# EAGLE board BSB-Board (EAGLE 7.1.0)
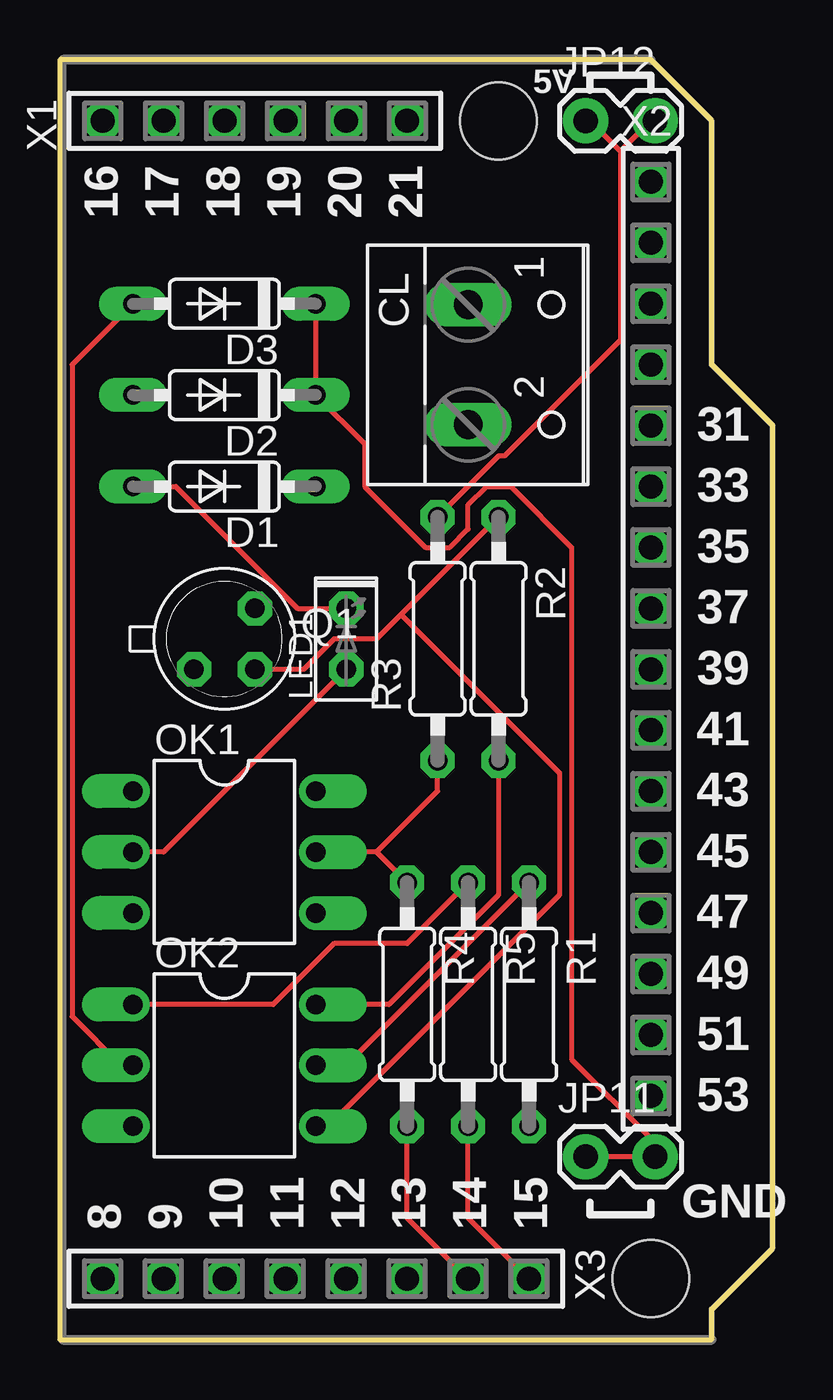
[diagram p0: board, top side]
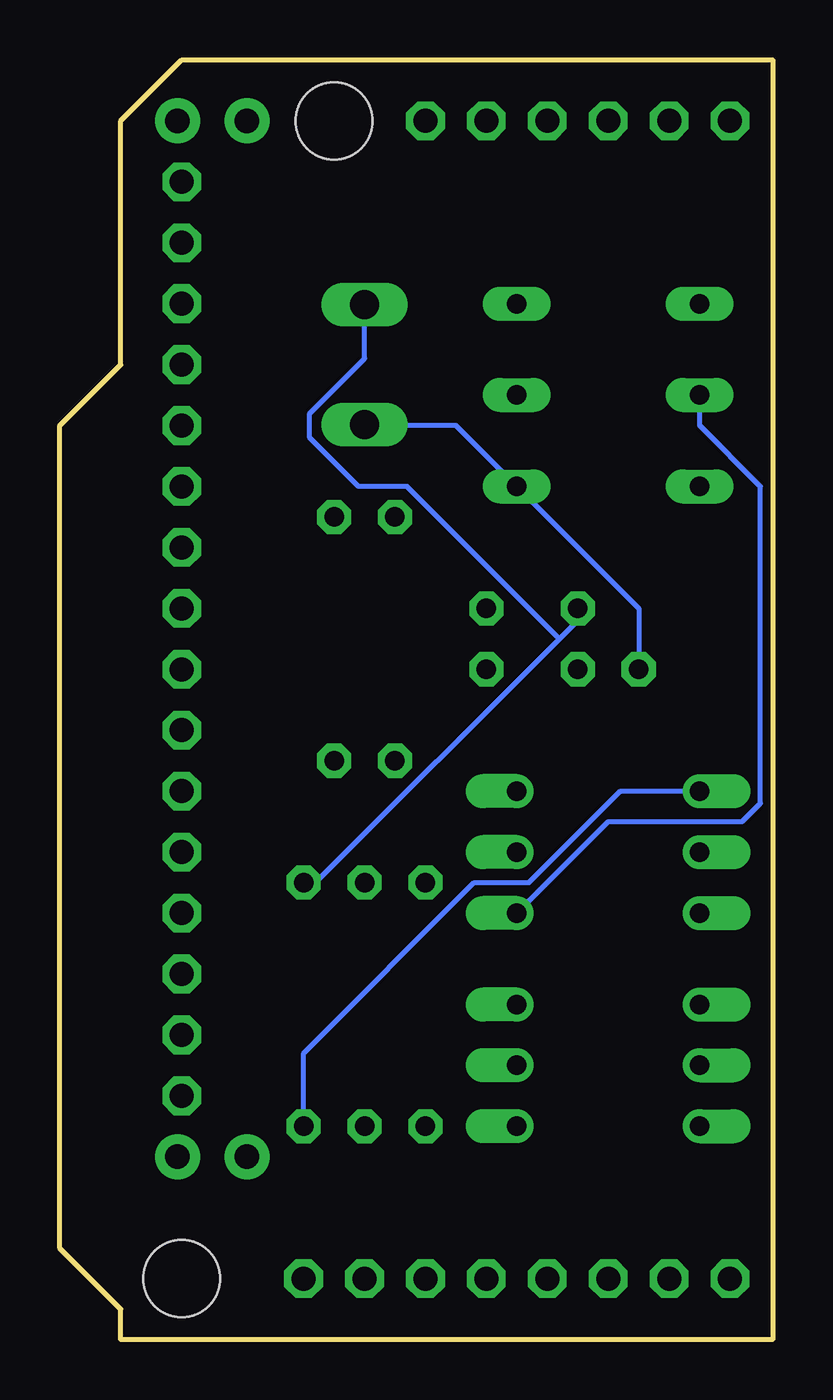
[diagram p1: board, bottom side, seen from below]

Size 29.72 x 53.34 mm. Coordinates in mm from the lower left corner, seen from the top.
Outline: 0,0 27.18,0 27.18,1.27 29.72,3.81 29.72,38.1 27.18,40.64 27.18,50.8 24.64,53.34 0,53.34 0,0
Copper layers (1*16): Top 0.035mm / dielectric 1.5mm / Bottom 0.035mm
Design rules "SparkFun *": minimum track width 8mil, minimum drill 20mil, track to track 12mil, track to pad 12mil, pad to pad 12mil, via to via 8mil, smd to smd 8mil, copper to edge 10mil, drill to drill 8mil, minimum pad ring 12mil, minimum via ring 10mil, stop-mask expansion 4mil, vias tented up to drill 25mil, thermal gap 10mil
Holes 3.2 mm at 18.29,50.8 24.64,2.54

## Footprints (pad centres in the part's own frame; a part is rotated, then mirrored left to right if it is on the bottom)
W237-102 = drill 1.194 long: 1 -2.5,-1.27; 2 2.5,-1.27
DO35-7 = drill 0.813 long: A 3.81,0; C -3.81,0
1X02_LOCK = drill 1.016 pad 1.88: 1 -0.178,0; 2 2.718,0
LED2X5 = drill 0.813 octagon: A -1.27,0; K 1.27,0
DIL06 = drill 0.813 offset: 1 -2.54,-3.81; 2 0,-3.81; 3 2.54,-3.81; 4 2.54,3.81; 5 0,3.81; 6 -2.54,3.81
TO18 = drill 0.813 octagon: 1 -1.27,-1.27; 2 1.27,-1.27; 3 1.27,1.27
0207/10 = drill 0.813 octagon: 1 -5.08,0; 2 5.08,0
SSW-106-02-S-S = drill 1 pad 1.5 octagon: 1 -6.35,0; 2 -3.81,0; 3 -1.27,0; 4 1.27,0; 5 3.81,0; 6 6.35,0
SSW-116-02-S-S = drill 1 pad 1.5 octagon: 1 -19.05,0; 2 -16.51,0; 3 -13.97,0; 4 -11.43,0; 5 -8.89,0; 6 -6.35,0; 7 -3.81,0; 8 -1.27,0; 9 1.27,0; 10 3.81,0; 11 6.35,0; 12 8.89,0; 13 11.43,0; 14 13.97,0; 15 16.51,0; 16 19.05,0
SSW-108-02-S-S = drill 1 pad 1.5 octagon: 1 -8.89,0; 2 -6.35,0; 3 -3.81,0; 4 -1.27,0; 5 1.27,0; 6 3.81,0; 7 6.35,0; 8 8.89,0

## Placement (x,y rotation side)
CL  - CL +  [W237-102]  18.29,40.64 270 top
D1  1N4148  [DO35-7]  6.86,35.56 180 top
D2  1N4148  [DO35-7]  6.86,39.37 180 top
D3  1N4148  [DO35-7]  6.86,43.18 180 top
JP11  [1X02_LOCK]  22.1,7.62 0 top
JP12  [1X02_LOCK]  22.1,50.8 0 top
LED1  LED->|  [LED2X5]  11.94,29.21 90 top
OK1  4N25M  [DIL06]  6.86,20.32 270 top
OK2  4N25M  [DIL06]  6.86,11.43 270 top
Q1  BC107  [TO18]  6.86,29.21 0 top
R1  1k5  [0207/10]  19.56,13.97 270 top
R2  560k  [0207/10]  18.29,29.21 270 top
R3  2k2  [0207/10]  15.75,29.21 90 top
R4  287  [0207/10]  14.48,13.97 270 top
R5  374  [0207/10]  17.02,13.97 270 top
X1  SSW-106-02-S-S  [SSW-106-02-S-S]  8.13,50.8 0 top
X2  SSW-116-02-S-S  [SSW-116-02-S-S]  24.64,29.21 270 top
X3  [SSW-108-02-S-S]  10.67,2.54 180 top

## Library data of the parts
CL = con-wago-500; MPN: 237-102; OC_FARNELL: unknown; OC_NEWARK: 70K9898
D1-D3 = diode
JP11 JP12 = SparkFun
LED1 = led
OK1 OK2 = optocoupler; MPN: 4N25-M; OC_FARNELL: 1021349; OC_NEWARK: 98K9084
Q1 = transistor-npn
R1-R5 = eagle-ltspice; SPICEMODEL: NONE; SPICEPREFIX: R
X1 = con-samtec; MPN: SSW-106-02-S-S; OC_FARNELL: unknown; OC_NEWARK: 11P9416
X2 = con-samtec; MPN: SSW-116-02-S-S; OC_FARNELL: unknown; OC_NEWARK: 29C5896
X3 = con-samtec; MPN: SSW-108-02-S-S; OC_FARNELL: unknown; OC_NEWARK: 11P9448

## Nets
A14: R4.2 X3.2
A15: R5.2 X3.1
D23: X2.1
D25: X2.2
D27: X2.3
D29: X2.4
D31: X2.5
D33: X2.6
D35: X2.7
D37: X2.8
D39: X2.9
D41: X2.10
D43: X2.11
D45: X2.12
D47: X2.13
D49: X2.14
D51: X2.15
D53: X2.16
N$1: OK1.1 R1.2
N$2: LED1.A OK1.2
N$3: OK2.6 R2.2
N$4: D1.A LED1.K
N$5: OK2.4 Q1.2 R2.1
N$6: CL.1 OK2.5 Q1.3 R1.1
N$7: CL.2 D1.C Q1.1
N$8: OK1.5 R3.1 R4.1
N$9: D2.A OK1.4
N$10: D2.C D3.C JP11.1 JP11.2
N$11: OK2.1 R5.1
N$13: D3.A OK2.2
N$14: JP12.1 JP12.2 R3.2

## Tracks (layer width: path | path; a pad name or v marks a point on that pad's centre or on a via)
A14
  Top 0.203: R4.2 14.48,5.08 X3.2
A15
  Top 0.203: R5.2 17.02,5.08 X3.1
N$1
  Bottom 0.203: OK1.1 6.35,22.86 10.16,19.05 12.45,19.05 19.56,11.94 R1.2
N$2
  Top 0.203: OK1.2 4.32,20.32 LED1.A
N$3
  Top 0.203: OK2.6 13.72,13.97 18.29,18.54 R2.2
N$4
  Top 0.203: LED1.K 9.91,30.48 4.83,35.56 D1.A
N$5
  Top 0.203: Q1.2 10.16,27.94 11.43,29.21 13.21,29.21 14.22,30.23 | R2.1 14.22,30.23 | OK2.4 11.18,8.89 20.83,18.54 20.83,23.62 14.22,30.23
N$6
  Top 0.203: OK2.5 11.94,11.43 R1.1
  Bottom 0.203: Q1.3 8.13,29.97 8.89,29.21 | 8.89,29.21 19.05,19.05 R1.1 | CL.1 17.02,40.89 19.3,38.61 19.3,37.59 17.27,35.56 15.24,35.56 8.89,29.21
N$7
  Bottom 0.203: Q1.1 5.59,30.48 D1.C 13.21,38.1 17.02,38.1 CL.2
N$8
  Top 0.203: 13.21,20.32 OK1.5 | R4.1 13.21,20.32 | R3.1 15.75,22.86 13.21,20.32
N$9
  Bottom 0.203: D2.A 3.05,38.1 0.51,35.56 0.51,22.35 1.27,21.59 6.86,21.59 OK1.4
N$10
  Top 0.203: D3.C D2.C 12.7,37.34 12.7,35.56 15.24,33.02 16.26,33.02 17.02,33.78 17.02,34.8 17.78,35.56 18.8,35.56 21.34,33.02 21.34,11.68 24.64,8.38 24.64,7.62 | 24.64,7.62 JP11.1 | 24.64,7.62 JP11.2
N$11
  Top 0.203: OK2.1 8.89,13.97 11.43,16.51 14.48,16.51 R5.1
N$13
  Top 0.203: OK2.2 2.54,11.43 0.51,13.46 0.51,40.64 D3.A
N$14
  Top 0.203: R3.2 18.29,36.83 18.54,36.83 23.37,41.66 23.37,49.53 | 23.37,49.53 24.64,50.8 JP12.2 | 23.37,49.53 22.1,50.8 JP12.1

## Text on the board
tPlace: 5V | 16 | 17 | 18 | 19 | 20 | 21 | 31 | 33 | 35 | 37 | 39 | 41 | 43 | 45 | 47 | 49 | 51 | 53 | 8 | 9 | 10 | 11 | 12 | 13 | 14 | 15 | GND
tValues: Schematics by Gero Schumacher / Board layout by Frederik Holst